# Altium PCB PCB1.PcbDoc
Units mm, origin at the board's own origin, x right, y up, seen from the top; angles counter-clockwise.
Board outline 95 x 60 mm, 2 copper layers (L1 (PWR), L4 (Sig)), stack 1.535 mm thick; 65 components, 34 nets, 229 pads, 84 vias.
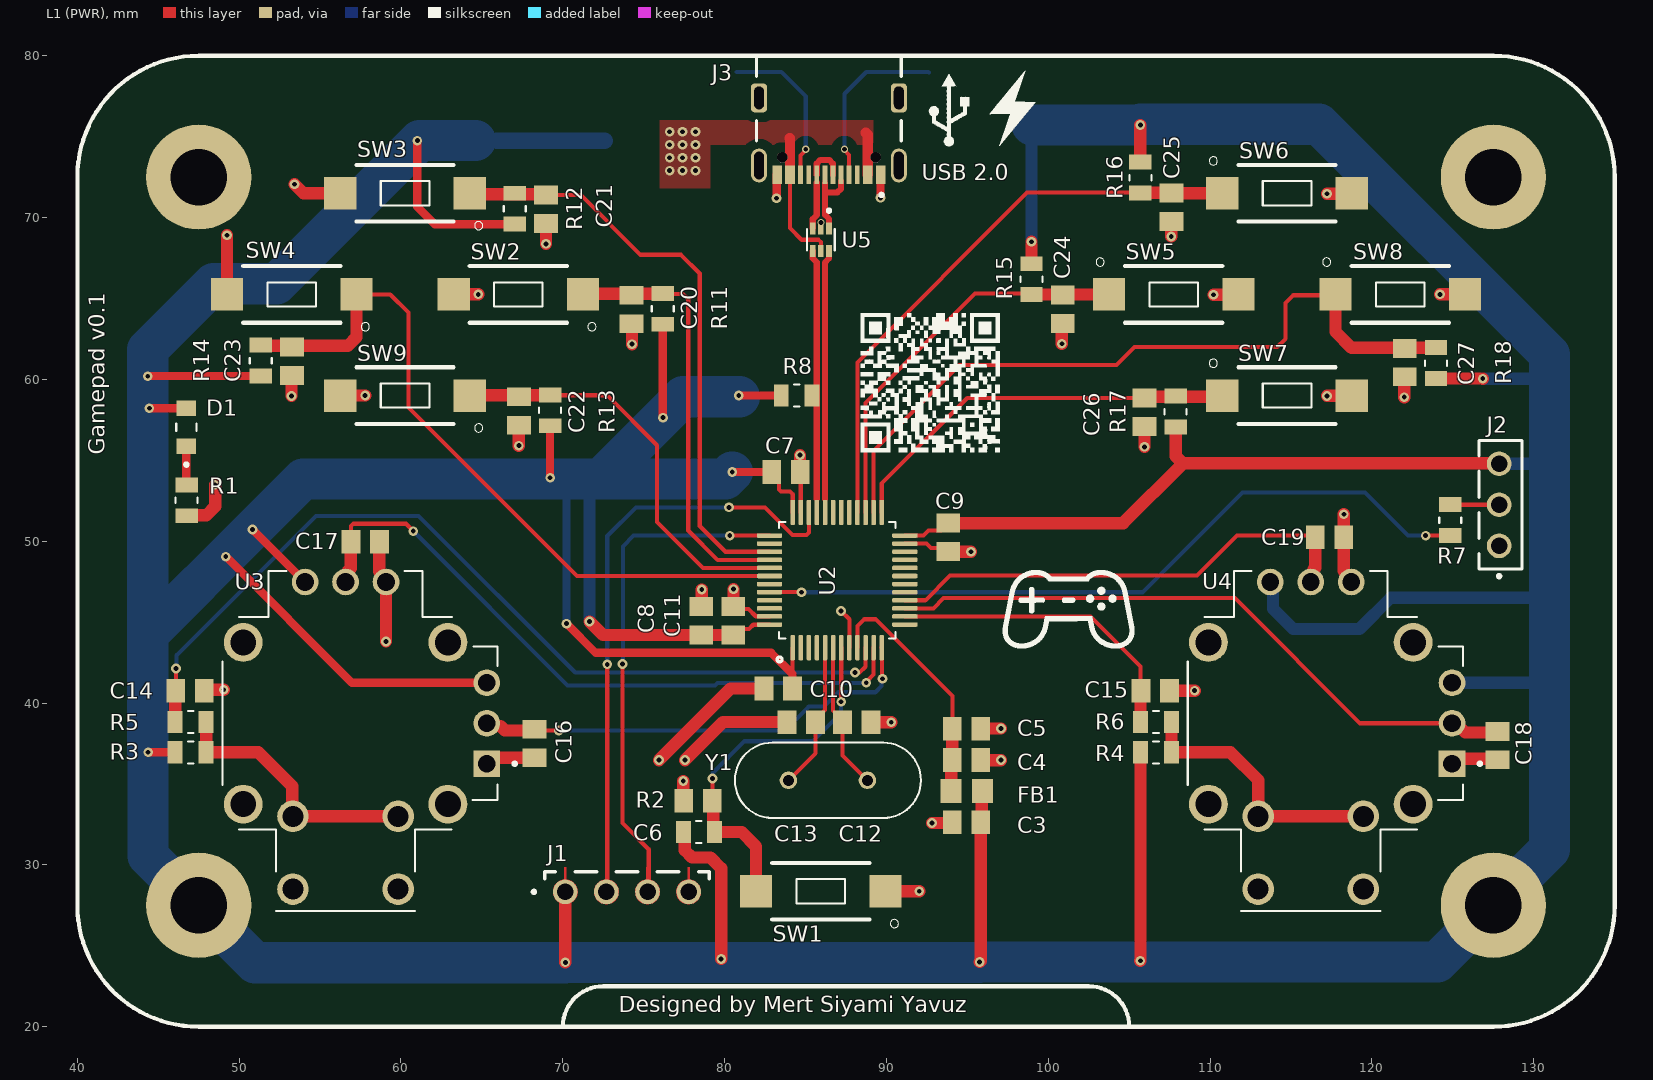
[diagram p0: L1 (PWR) view]
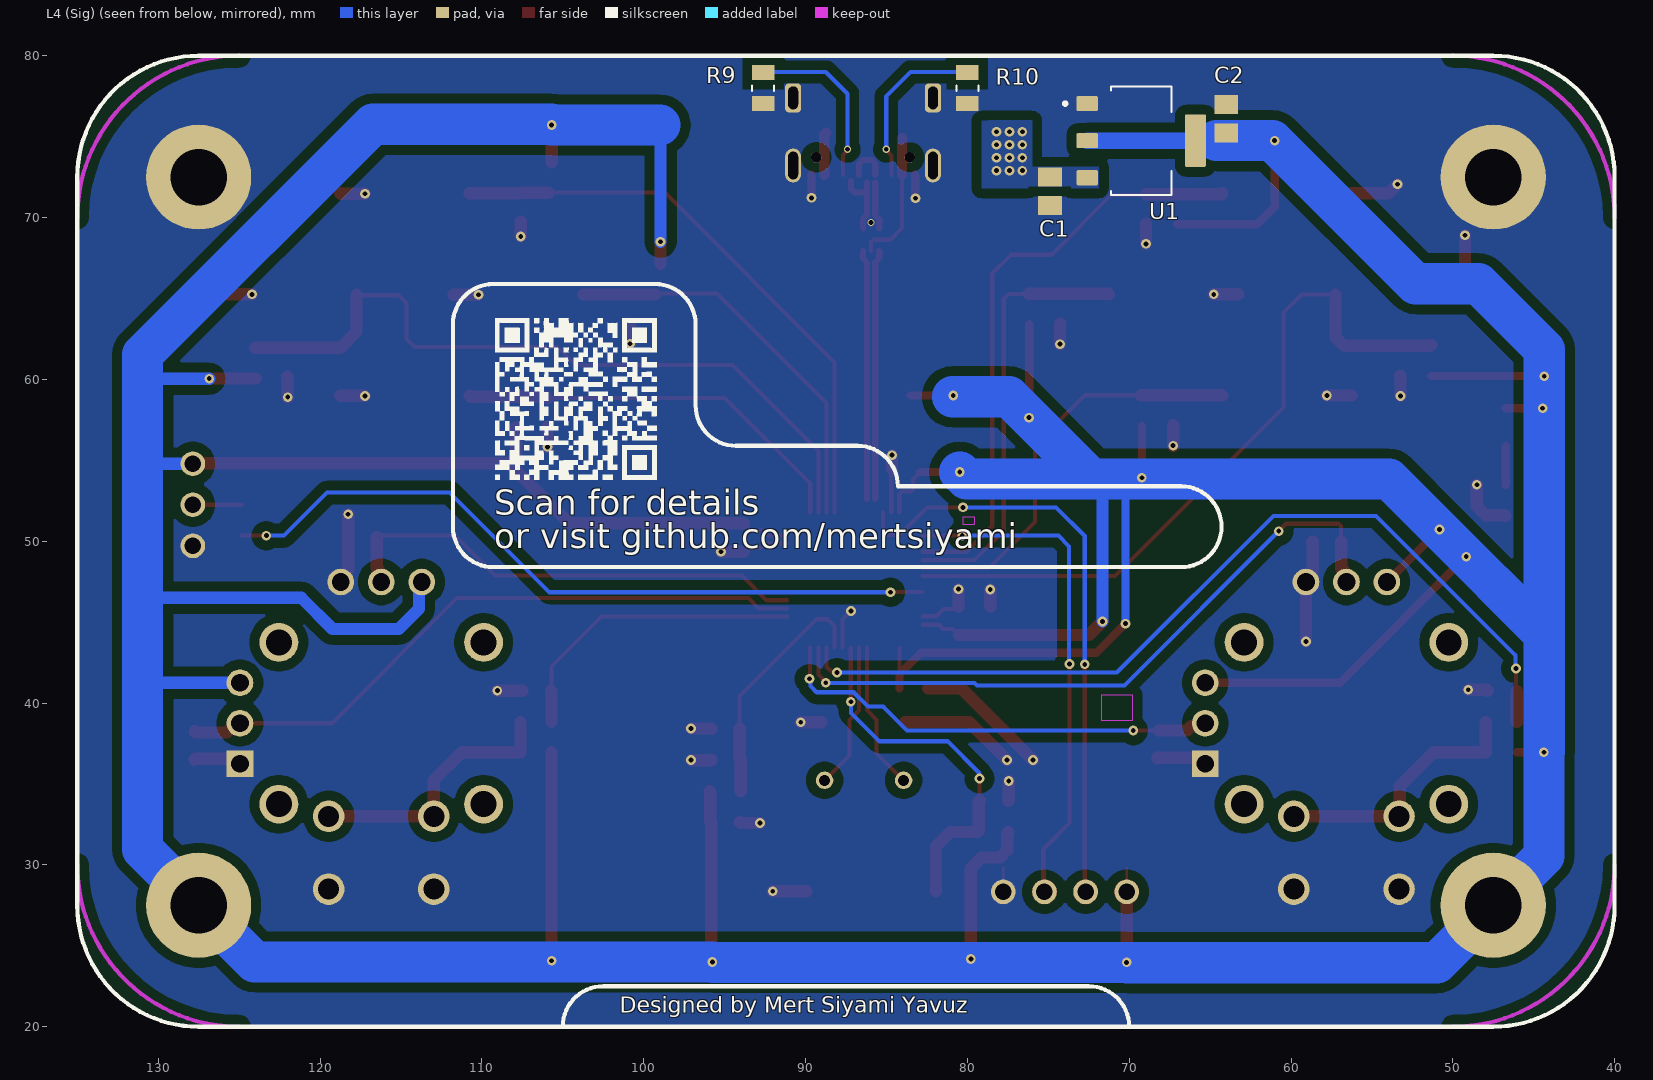
[diagram p1: L4 (Sig) view, seen from below]
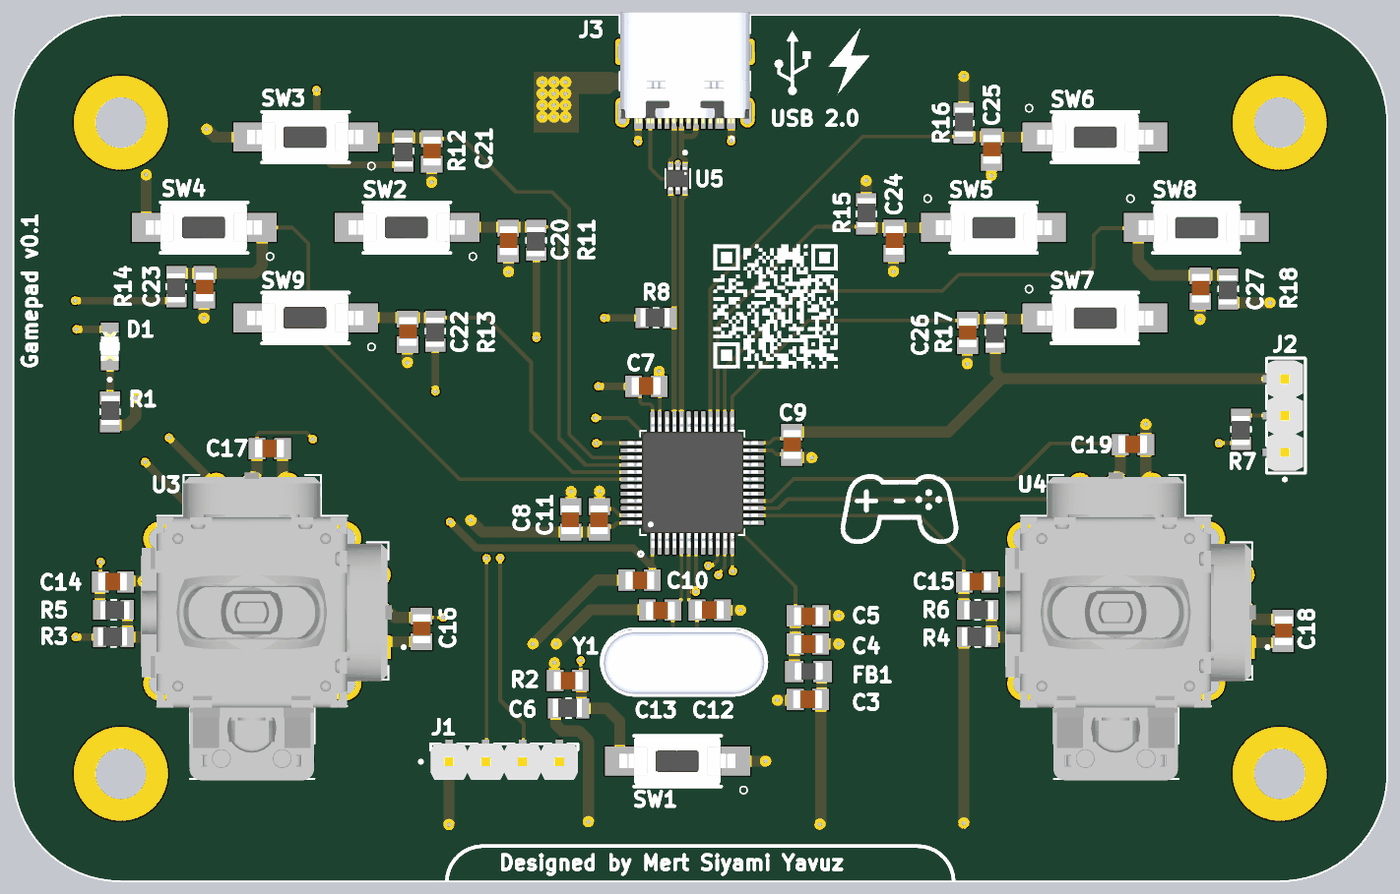
[diagram p2: 3D render of the assembled board from above, using the file's embedded part models]
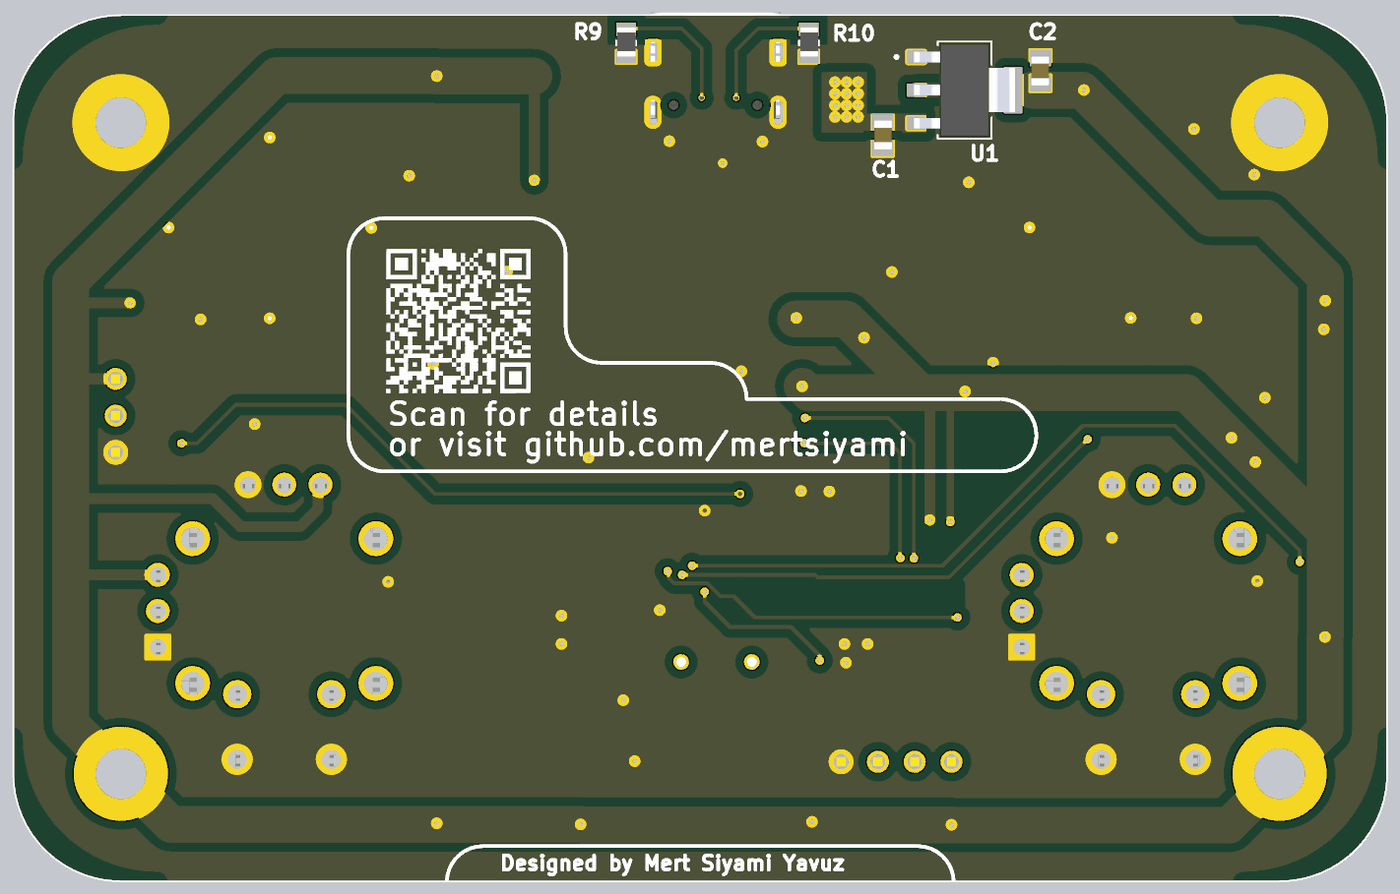
[diagram p3: 3D render of the assembled board from below, using the file's embedded part models]

## Layer stack, top to bottom
Top Solder: solder mask 0.01, Solder Resist, Dk 3.5
L1 (PWR): signal copper 0.035
Dielectric 1: core 1.465, Core-039, Dk 4.8
L4 (Sig): signal copper 0.035
Bottom Solder: solder mask 0.01, Solder Resist, Dk 3.5

## Board outline
40,27.5 ccw(c47.5,27.5) 47.5,20 127.5,20 ccw(c127.5,27.5) 135,27.5 135,72.5 ccw(c127.5,72.5) 127.5,80 47.5,80 ccw(c47.5,72.5) 40,72.5

## Design rules (kind name [scope] priority, off if disabled: settings)
Clearance [InPolygon] p1: gap=0.6 ignorepadtopadclearanceinfootprint=TRUE
Clearance Clearance_2 [All] p2 off: gap=0.1 ignorepadtopadclearanceinfootprint=TRUE
ComponentClearance [All] p1 off: gap=0.254 collisioncheckmode=3 verticalgap=0.254 showdistances=FALSE
DiffPairsRouting DiffPairsRouting_2 [InDifferentialPair('USBSTM')] p1: maxlimit=0.127 minlimit=0.127 mostfreqgap=0.127 toplayer_minwidth=0.38 toplayer_maxwidth=0.38 toplayer_prefwidth=0.38 bottomlayer_minwidth=0.38 bottomlayer_maxwidth=0.38 bottomlayer_prefwidth=0.38 impedanceprofiledriven=TRUE impedanceprofileid={373E327E-05DF-448B-B669-AD6836C57D6D} impedanceprofilevalue=90.000000 maxuncoupledlength=12.7
DiffPairsRouting DiffPairsRouting_1 [InDifferentialPair('USB')] p2: maxlimit=0.127 minlimit=0.127 mostfreqgap=0.127 toplayer_minwidth=0.38 toplayer_maxwidth=0.38 toplayer_prefwidth=0.38 bottomlayer_minwidth=0.38 bottomlayer_maxwidth=0.38 bottomlayer_prefwidth=0.38 impedanceprofiledriven=TRUE impedanceprofileid={373E327E-05DF-448B-B669-AD6836C57D6D} impedanceprofilevalue=90.000000 maxuncoupledlength=12.7
HoleSize [All] p1: absolutevalues=TRUE maxlimit=10 minlimit=0.025 maxpercent=80.000 minpercent=20.000
HoleToHoleClearance [All] p1: gap=0.1 allowstackedmicrovias=TRUE
MinimumSolderMaskSliver [All] p1: minsoldermaskwidth=0.015
PlaneClearance [All] p1 off: clearance=3
PlaneConnect [All] p1: planeconnectstyle=Direct reliefexpansion=0.508 reliefentries=4 reliefconductorwidth=0.254 reliefairgap=0.254
PolygonConnect [All] p1: connectstyle=Direct reliefconductorwidth=0.254 reliefentries=4 polygonreliefangle="90 Angle" airgapwidth=0.254
RoutingVias [All] p1: holewidth=0.254 width=0.254 viastyle="Through Hole" minholewidth=0.15 minwidth=0.25 maxholewidth=0.762 maxwidth=0.762
RoutingVias RoutingVias_1 [All] p2: holewidth=0.711 width=1.27 viastyle="Through Hole" minholewidth=0.711 minwidth=1.27 maxholewidth=0.711 maxwidth=1.27
ShortCircuit ShortCircuit_1 [All] p1: allowed=FALSE
ShortCircuit [All] p2: allowed=FALSE
SilkToSilkClearance [All] p1: silktosilkclearance=0.1
SilkToSolderMaskClearance [IsPad] p1: minsilkscreentomaskgap=0.1 clearancetoexposedcopper=TRUE
SolderMaskExpansion [All] p1: expansion=0.102 istentingtop=FALSE
Width [All] p1: maxlimit=2.54 minlimit=0.16 preferedwidth=0.254 minimp=50.000000 maximp=50.000000 favimp=50.000000
Width Width_1 [All] p2 off: maxlimit=0.254 minlimit=0.254 preferedwidth=0.254
20 further rules are at their usual default settings.

## Classes and differential pairs
differential pair USBSTM: +USBSTM_P -USBSTM_N
differential pair USB: +USB_P -USB_N

## Components (designator, comment, footprint, x,y, rotation, side; value= is the part's Value field where it differs from the comment)
C1 "22uF" CAPC2012X94N 74.9,71.625 r90 bottom
C2 "22uF" CAPC2012X94N 64.008,76.098 r270 bottom
C3 "1uF" CAPC2012X94N 94.94,32.632 r180 top
C4 "10nF" CAPC2012X94N 94.94,36.487 r0 top
C5 "1uF" CAPC2012X94N 94.94,38.414 r0 top
C6 "100nF" CAPC2012X94N 78.359,33.96 r0 top
C7 "100nF" CAPC2012X94N 83.786,54.28 r180 top
C8 "100nF" CAPC2012X94N 78.557,45.082 r270 top
C9 "100nF" CAPC2012X94N 93.822,50.238 r90 top
C10 "100nF" CAPC2012X94N 83.312,40.894 r0 top
C11 "10uF" CAPC2012X94N 80.538,45.082 r270 top
C12 "22pF" CAPC2012X94N 88.158,38.808 r180 top
C13 "22pF" CAPC2012X94N 84.729,38.808 r0 top
C14 "100nF" CAPC2012X94N 46.956,40.761 r180 top
C15 "100nF" CAPC2012X94N 106.608,40.761 r180 top
C16 "100nF" CAPC2012X94N 68.25,37.5 r90 top
C17 "100nF" CAPC2012X94N 57.785,49.962 r180 top
C18 "100nF" CAPC2012X94N 127.75,37.37 r90 top
C19 "100nF" CAPC2012X94N 117.38,50.25 r180 top
C20 "100nF" CAPC2012X94N 74.25,64.322 r90 top
C21 "100nF" CAPC2012X94N 68.961,70.51 r90 top
C22 "100nF" CAPC2012X94N 67.297,58.045 r90 top
C23 "100nF" CAPC2012X94N 53.258,61.12 r90 top
C24 "100nF" CAPC2012X94N 100.889,64.338 r90 top
C25 "100nF" CAPC2012X94N 107.608,70.634 r90 top
C26 "100nF" CAPC2012X94N 105.943,57.963 r90 top
C27 "100nF" CAPC2012X94N 122.022,61.036 r90 top
D1 "LED" "LED_V0805-SMD-R (RED)" 46.737,57.038 r90 top
FB1 "120R" FB_MI0805K400R-10 94.965,34.559 r0 top
J1 "MALE HEADER 1X4" SAMTEC_MTLW-104-X-X-S-X 73.965,28.331 r180 top
J2 "MALE HEADER 1X3" SAMTEC_MTLW-103-XX-XX-S-XXX 127.855,52.252 r270 top
J3 "USB4105GFA060" GCT_USB4105GFA060 86.444,77.396 r180 top
R1 "1k5" RESC2012X60N 46.751,52.527 r90 top
R2 "10k" RESC2012X60N 78.408,32.027 r180 top
R3 "5k1" RESC2012X60N 47.001,36.951 r180 top
R4 "5k1" RESC2012X60N 106.653,36.951 r180 top
R5 "5k1" RESC2012X60N 47.001,38.831 r0 top
R6 "5k1" RESC2012X60N 106.653,38.831 r0 top
R7 "10k" RESC2012X60N 124.838,51.305 r270 top
R8 "RES" RESC2012X60N 84.454,59.006 r180 top
R9 "5k1" RESC2012X60N 92.618,78 r90 bottom
R10 "5k1" RESC2012X60N 80,78 r90 bottom
R11 "5k1" RESC2012X60N 76.175,64.364 r270 top
R12 "5k1" RESC2012X60N 67.031,70.548 r270 top
R13 "5k1" RESC2012X60N 69.215,58.09 r270 top
R14 "5k1" RESC2012X60N 51.333,61.165 r270 top
R15 "5k1" RESC2012X60N 98.958,66.192 r90 top
R16 "5k1" RESC2012X60N 105.689,72.466 r90 top
R17 "5k1" RESC2012X60N 107.869,58.011 r270 top
R18 "5k1" RESC2012X60N 123.952,61.011 r270 top
SW1 "RS-032G05A3-SMRT" SW_RS-032G05A3-SMRT 85.94,28.372 r180 top
SW2 "RS-032G05A3-SMRT" SW_RS-032G05A3-SMRT 67.25,65.25 r180 top
SW3 "RS-032G05A3-SMRT" SW_RS-032G05A3-SMRT 60.25,71.5 r180 top
SW4 "RS-032G05A3-SMRT" SW_RS-032G05A3-SMRT 53.25,65.25 r180 top
SW5 "RS-032G05A3-SMRT" SW_RS-032G05A3-SMRT 107.75,65.25 r0 top
SW6 "RS-032G05A3-SMRT" SW_RS-032G05A3-SMRT 114.75,71.5 r0 top
SW7 "RS-032G05A3-SMRT" SW_RS-032G05A3-SMRT 114.75,59 r0 top
SW8 "RS-032G05A3-SMRT" SW_RS-032G05A3-SMRT 121.75,65.25 r0 top
SW9 "RS-032G05A3-SMRT" SW_RS-032G05A3-SMRT 60.25,59 r180 top
U1 "AMS1117" SOT229P700X180-4N 69.25,74.75 r180 bottom
U2 "STM32F103C8T6TR" QFP50P900X900X160-48N 86.955,47.601 r90 top
U3 "THB001P" CNK_THB001P 56.575,38.75 r0 top
U4 "THB001P" CNK_THB001P 116.218,38.75 r0 top
U5 "USBLC6-2P6" SOT50P160X60-6N 85.948,68.628 r270 top
Y1 "8MHz" XTAL_HC49P488W43L1150T466H350 86.38,35.227 r0 top

## Footprints (in the part's own frame and the unit in brackets; to place one, negate y for a bottom-side part, rotate by r counter-clockwise, add the part's x,y. Pads: shape width x height; smd on the part's side, far side on the other; paste and mask are expansions set on the pad)
CAPC2012X94N [mm]
  rect 1.16x1.47 smd: 1(-0.88,0) 2(0.88,0)
  body extent -0.98,-0.65 1.03,0.6, height 0.94
CNK_THB001P [mm]
  round 1.95 hole 1.3: A(-3.25,-5.75) B(3.25,-5.75) C(-3.25,-10.25) D(3.25,-10.25)
  round 2.4 hole 1.6: S1(6.325,5) S2(-6.325,5) S3(-6.325,-5) S4(6.325,-5)
  rect 1.65x1.65 / inner round 1.65 / far side rect 1.65x1.65 hole 1.1: VR1_1(8.73,-2.5)
  round 1.65 hole 1.1: VR1_2(8.73,0) VR1_3(8.73,2.5) VR2_1(2.5,8.73) VR2_2(0,8.73) VR2_3(-2.5,8.73)
  silkscreen extent -7.6,-11.6 10.55,9.4, body extent -7.64,-11.7 9.64,9.58, height 19.35
FB_MI0805K400R-10 [mm]
  rect 1.285x1.47 smd: 1(-0.973,0) 2(0.973,0)
  body extent -0.97,-0.6 1.03,0.65, height 1.1
GCT_USB4105GFA060 [mm]
  rect 0.6x1.15 smd: A1_B12(-3.2,4.755) A4_B9(-2.4,4.755) B1_A12(3.2,4.755) B4_A9(2.4,4.755)
  rect 0.3x1.15 smd: A5(-1.25,4.755) A6(-0.25,4.755) A7(0.25,4.755) A8(1.25,4.755) B5(1.75,4.755) B6(0.75,4.755) B7(-0.75,4.755) B8(-1.75,4.755)
  oval 1x2.1 hole 0.6 slot 1.7 at 90 deg: SH1(-4.32,4.18) SH2(4.32,4.18)
  rrect50% 1x1.8 hole 0.6 slot 1.4 at 90 deg: SH3(-4.32,0) SH4(4.32,0)
  round 0.65 hole 0.65 unplated: ""(-2.89,3.68) ""(2.89,3.68)
  silkscreen extent -4.47,-2.6 4.47,6.1, body extent -4.47,-2.75 4.47,4.96, height 3.31
"LED_V0805-SMD-R (RED)" [mm]
  rect 0.95x1.2 smd: 1(-1.175,0) 2(1.175,0)
  silkscreen extent -2.4,-0.63 0.23,0.63, body extent -1,-0.63 1,0.63, height 0.8
QFP50P900X900X160-48N [mm]
  rrect50% 1.56x0.28 smd: 1(-4.18,2.75) 2(-4.18,2.25) 3(-4.18,1.75) 4(-4.18,1.25) 5(-4.18,0.75) 6(-4.18,0.25) 7(-4.18,-0.25) 8(-4.18,-0.75) 9(-4.18,-1.25) 10(-4.18,-1.75) 11(-4.18,-2.25) 12(-4.18,-2.75) 25(4.18,-2.75) 26(4.18,-2.25) 27(4.18,-1.75) 28(4.18,-1.25) 29(4.18,-0.75) 30(4.18,-0.25) 31(4.18,0.25) 32(4.18,0.75) 33(4.18,1.25) 34(4.18,1.75) 35(4.18,2.25) 36(4.18,2.75)
  rrect50% 0.28x1.56 smd: 13(-2.75,-4.18) 14(-2.25,-4.18) 15(-1.75,-4.18) 16(-1.25,-4.18) 17(-0.75,-4.18) 18(-0.25,-4.18) 19(0.25,-4.18) 20(0.75,-4.18) 21(1.25,-4.18) 22(1.75,-4.18) 23(2.25,-4.18) 24(2.75,-4.18) 37(2.75,4.18) 38(2.25,4.18) 39(1.75,4.18) 40(1.25,4.18) 41(0.75,4.18) 42(0.25,4.18) 43(-0.25,4.18) 44(-0.75,4.18) 45(-1.25,4.18) 46(-1.75,4.18) 47(-2.25,4.18) 48(-2.75,4.18)
  silkscreen extent -5.06,-3.6 3.6,3.71, body extent -4.47,-4.53 4.53,4.47, height 1.6
RESC2012X60N [mm]
  rect 0.92x1.38 smd: 1(-0.955,0) 2(0.955,0)
  silkscreen extent -0.17,-0.68 0.17,0.68, body extent -0.92,-0.65 1.08,0.6, height 0.6
SAMTEC_MTLW-103-XX-XX-S-XXX [mm]
  round 1.52 hole 1.02: 01(2.54,0) 02(0,0) 03(-2.54,0)
  silkscreen extent -3.97,-1.24 4.51,1.42, body extent -3.81,-1.24 3.81,1.24, height 5.84
SAMTEC_MTLW-104-X-X-S-X [mm]
  round 1.52 hole 1.02: 01(3.81,0) 02(1.27,0) 03(-1.27,0) 04(-3.81,0)
  L1 (PWR) region: 3.889,0.756 3.968,0.743 4.045,0.723 4.119,0.694 4.19,0.658 4.257,0.615 4.319,0.565 4.375,0.509 4.425,0.447 4.468,0.38 4.504,0.309 4.533,0.235 4.553,0.158 4.566,0.079 4.57,0 4.569,-0.038 4.566,-0.076 4.562,-0.113 4.555,-0.151 4.547,-0.187 4.537,-0.224 4.525,-0.259 4.511,-0.294 4.496,-0.329 4.479,-0.363 4.46,-0.395 4.44,-0.427 4.418,-0.458 4.395,-0.487 4.37,-0.516 4.344,-0.543 4.316,-0.569 4.287,-0.593 4.258,-0.616 4.227,-0.638 4.195,-0.658 4.162,-0.676 4.128,-0.692 4.093,-0.707 4.058,-0.721 4.022,-0.732 3.986,-0.742 3.949,-0.75 3.912,-0.756 3.875,-0.76 3.875,-1.53 3.745,-1.53 3.745,-0.76 3.708,-0.756 3.671,-0.75 3.634,-0.742 3.598,-0.732 3.562,-0.721 3.527,-0.707 3.492,-0.692 3.458,-0.676 3.425,-0.658 3.393,-0.638 3.362,-0.616 3.333,-0.593 3.304,-0.569 3.276,-0.543 3.25,-0.516 3.225,-0.487 3.202,-0.458 3.18,-0.427 3.16,-0.395 3.141,-0.363 3.124,-0.329 3.109,-0.294 3.095,-0.259 3.083,-0.224 3.073,-0.187 3.065,-0.151 3.058,-0.113 3.054,-0.076 3.051,-0.038 3.05,0 3.054,0.079 3.067,0.158 3.087,0.235 3.116,0.309 3.152,0.38 3.195,0.447 3.245,0.509 3.301,0.565 3.363,0.615 3.43,0.658 3.501,0.694 3.575,0.723 3.652,0.743 3.731,0.756 3.81,0.76
  L1 (PWR) region: 1.349,0.756 1.428,0.743 1.505,0.723 1.579,0.694 1.65,0.658 1.717,0.615 1.779,0.565 1.835,0.509 1.885,0.447 1.928,0.38 1.964,0.309 1.993,0.235 2.013,0.158 2.026,0.079 2.03,0 2.029,-0.038 2.026,-0.076 2.022,-0.113 2.015,-0.151 2.007,-0.187 1.997,-0.224 1.985,-0.259 1.971,-0.294 1.956,-0.329 1.939,-0.363 1.92,-0.395 1.9,-0.427 1.878,-0.458 1.855,-0.487 1.83,-0.516 1.804,-0.543 1.776,-0.569 1.747,-0.593 1.718,-0.616 1.687,-0.638 1.655,-0.658 1.622,-0.676 1.588,-0.692 1.553,-0.707 1.518,-0.721 1.482,-0.732 1.446,-0.742 1.409,-0.75 1.372,-0.756 1.335,-0.76 1.335,-1.53 1.205,-1.53 1.205,-0.76 1.168,-0.756 1.131,-0.75 1.094,-0.742 1.058,-0.732 1.022,-0.721 0.987,-0.707 0.952,-0.692 0.918,-0.676 0.885,-0.658 0.853,-0.638 0.822,-0.616 0.793,-0.593 0.764,-0.569 0.736,-0.543 0.71,-0.516 0.685,-0.487 0.662,-0.458 0.64,-0.427 0.62,-0.395 0.601,-0.363 0.584,-0.329 0.569,-0.294 0.555,-0.259 0.543,-0.224 0.533,-0.187 0.525,-0.151 0.518,-0.113 0.514,-0.076 0.511,-0.038 0.51,0 0.514,0.079 0.527,0.158 0.547,0.235 0.576,0.309 0.612,0.38 0.655,0.447 0.705,0.509 0.761,0.565 0.823,0.615 0.89,0.658 0.961,0.694 1.035,0.723 1.112,0.743 1.191,0.756 1.27,0.76
  L1 (PWR) region: -1.191,0.756 -1.112,0.743 -1.035,0.723 -0.961,0.694 -0.89,0.658 -0.823,0.615 -0.761,0.565 -0.705,0.509 -0.655,0.447 -0.612,0.38 -0.576,0.309 -0.547,0.235 -0.527,0.158 -0.514,0.079 -0.51,0 -0.511,-0.038 -0.514,-0.076 -0.518,-0.113 -0.525,-0.151 -0.533,-0.187 -0.543,-0.224 -0.555,-0.259 -0.569,-0.294 -0.584,-0.329 -0.601,-0.363 -0.62,-0.395 -0.64,-0.427 -0.662,-0.458 -0.685,-0.487 -0.71,-0.516 -0.736,-0.543 -0.764,-0.569 -0.793,-0.593 -0.822,-0.616 -0.853,-0.638 -0.885,-0.658 -0.918,-0.676 -0.952,-0.692 -0.987,-0.707 -1.022,-0.721 -1.058,-0.732 -1.094,-0.742 -1.131,-0.75 -1.168,-0.756 -1.205,-0.76 -1.205,-1.53 -1.335,-1.53 -1.335,-0.76 -1.372,-0.756 -1.409,-0.75 -1.446,-0.742 -1.482,-0.732 -1.518,-0.721 -1.553,-0.707 -1.588,-0.692 -1.622,-0.676 -1.655,-0.658 -1.687,-0.638 -1.718,-0.616 -1.747,-0.593 -1.776,-0.569 -1.804,-0.543 -1.83,-0.516 -1.855,-0.487 -1.878,-0.458 -1.9,-0.427 -1.92,-0.395 -1.939,-0.363 -1.956,-0.329 -1.971,-0.294 -1.985,-0.259 -1.997,-0.224 -2.007,-0.187 -2.015,-0.151 -2.022,-0.113 -2.026,-0.076 -2.029,-0.038 -2.03,0 -2.026,0.079 -2.013,0.158 -1.993,0.235 -1.964,0.309 -1.928,0.38 -1.885,0.447 -1.835,0.509 -1.779,0.565 -1.717,0.615 -1.65,0.658 -1.579,0.694 -1.505,0.723 -1.428,0.743 -1.349,0.756 -1.27,0.76
  L1 (PWR) region: -3.731,0.756 -3.652,0.743 -3.575,0.723 -3.501,0.694 -3.43,0.658 -3.363,0.615 -3.301,0.565 -3.245,0.509 -3.195,0.447 -3.152,0.38 -3.116,0.309 -3.087,0.235 -3.067,0.158 -3.054,0.079 -3.05,0 -3.051,-0.038 -3.054,-0.076 -3.058,-0.113 -3.065,-0.151 -3.073,-0.187 -3.083,-0.224 -3.095,-0.259 -3.109,-0.294 -3.124,-0.329 -3.141,-0.363 -3.16,-0.395 -3.18,-0.427 -3.202,-0.458 -3.225,-0.487 -3.25,-0.516 -3.276,-0.543 -3.304,-0.569 -3.333,-0.593 -3.362,-0.616 -3.393,-0.638 -3.425,-0.658 -3.458,-0.676 -3.492,-0.692 -3.527,-0.707 -3.562,-0.721 -3.598,-0.732 -3.634,-0.742 -3.671,-0.75 -3.708,-0.756 -3.745,-0.76 -3.745,-1.53 -3.875,-1.53 -3.875,-0.76 -3.912,-0.756 -3.949,-0.75 -3.986,-0.742 -4.022,-0.732 -4.058,-0.721 -4.093,-0.707 -4.128,-0.692 -4.162,-0.676 -4.195,-0.658 -4.227,-0.638 -4.258,-0.616 -4.287,-0.593 -4.316,-0.569 -4.344,-0.543 -4.37,-0.516 -4.395,-0.487 -4.418,-0.458 -4.44,-0.427 -4.46,-0.395 -4.479,-0.363 -4.496,-0.329 -4.511,-0.294 -4.525,-0.259 -4.537,-0.224 -4.547,-0.187 -4.555,-0.151 -4.562,-0.113 -4.566,-0.076 -4.569,-0.038 -4.57,0 -4.566,0.079 -4.553,0.158 -4.533,0.235 -4.504,0.309 -4.468,0.38 -4.425,0.447 -4.375,0.509 -4.319,0.565 -4.257,0.615 -4.19,0.658 -4.119,0.694 -4.045,0.723 -3.968,0.743 -3.889,0.756 -3.81,0.76
  silkscreen extent -5.08,-1.24 5.85,0.1, body extent -5.08,-1.24 5.08,1.24, height 9.91
SOT50P160X60-6N [mm]
  rrect8% 0.75x0.35 smd: 1(-0.69,0.5) 2(-0.69,0) 3(-0.69,-0.5) 4(0.69,-0.5) 5(0.69,0) 6(0.69,0.5)
  silkscreen extent -1.9,-0.85 0.65,0.85, body extent -0.81,-0.81 0.79,0.79, height 0.6
SOT229P700X180-4N [mm]
  rrect15% 1.31x0.93 smd: 1(-3.345,2.29) 2(-3.345,0) 3(-3.345,-2.29)
  rrect15% 1.31x3.24 smd: 4(3.345,0)
  silkscreen extent -4.8,-3.36 1.86,3.36, body extent -3.5,-3.25 3.5,3.25, height 1.8
SW_RS-032G05A3-SMRT [mm]
  rect 2x2 smd: 1(-4,0) 2(4,0)
  silkscreen extent -4.8,-1.75 3,2.25, body extent -3.97,-1.76 4.03,1.74, height 4.3
XTAL_HC49P488W43L1150T466H350 [mm]
  round 1.08 hole 0.68: 1(-2.44,0) 2(2.44,0)
  silkscreen extent -5.75,-2.33 5.75,2.33, body extent -5.75,-2.41 5.75,2.25, height 3.5

## Part data
C1 C2 C3 C4 C5 C6 C7 C8 C9 C10 C11 C12 C13 C14 C15 C16 C17 C18 C19 C20 C21 C22 C23 C24 C25 C26 C27: library part CAP, "10000pF Â±5% 16V Ceramic Capacitor X7R 0805 _2012 Metric_", Package="2012 AVX", Availability=Unavailable, MF=AVX, MP=0805YC103J4T2A, Price=None, SnapEDA_Link=https://www.snapeda.com/parts/0805YC103J4T2A/AVX/view-part/606803/?ref=snap
D1: "V0805 - Valcon 0805 Type Surface Mount LED", Package=None, Availability="No availability data", Check_prices=https://www.snapeda.com/parts/V0805-SMD-R%20(Red)/Valcon/view-part/4780809/?ref=eda, MF=Valcon, MP="V0805-SMD-R (Red)", Price=None, Purchase-URL="https://pricing.snapeda.com/search/part/V0805-SMD-R (Red)/?ref=eda", SnapEDA_Link=https://www.snapeda.com/parts/V0805-SMD-R%20(Red)/Valcon/view-part/4780809/?ref=snap
FB1: library part FB, "40 Ohms @ 100MHz 1 Power Line Ferrite Bead 0805 (2012 Metric) 1.5A 50mOhm", Package="0805 Laird-Signal Integrity Products", Availability=Warning, Check_prices=https://www.snapeda.com/parts/MI0805K400R-10/Laird/view-part/4794545/?ref=eda, MF="Laird-Signal Integrity Products", MP=MI0805K400R-10, Price=None, Purchase-URL=https://pricing.snapeda.com/search/part/MI0805K400R-10/?ref=eda, SnapEDA_Link=https://www.snapeda.com/parts/MI0805K400R-10/Laird/view-part/4794545/?ref=snap
J1 J3: Package=None, Availability=Unavailable, Price=None
  J1: MF="{'manufacturer': u'Samtec Inc.'}", MP=MTLW-104-X-X-S-X
  J3: MF="{'manufacturer': u'GCT'}", MP=USB4105GFA060
J2: "Connector Header Through Hole 40 position 0.100\" (2.54mm)", Package=None, Availability=Unavailable, MP=MTLW-103-XX-XX-S-XXX, Price=None
R1 R2 R3 R4 R5 R6 R7 R9 R10 R11 R12 R13 R14 R15 R16 R17 R18: library part RES, "330 Ohms Â±1% 0.125W, 1/8W Chip Resistor 0805 _2012 Metric_ Moisture Resistant Thick Film", Package="2012 Rohm Semiconductor", Availability=Unavailable, MF=Yageo, MP=RC0805FR-07330RL, Price=None, SnapEDA_Link=https://www.snapeda.com/parts/RC0805FR-07330RL/Yageo/view-part/106115/?ref=snap
R8: "330 Ohms Â±1% 0.125W, 1/8W Chip Resistor 0805 _2012 Metric_ Moisture Resistant Thick Film", Package="2012 Rohm Semiconductor", Availability=Unavailable, MF=Yageo, MP=RC0805FR-07330RL, Price=None, SnapEDA_Link=https://www.snapeda.com/parts/RC0805FR-07330RL/Yageo/view-part/106115/?ref=snap
SW1 SW2 SW3 SW4 SW5 SW6 SW7 SW8 SW9: "Tactile Switch SPST-NO Top Actuated Surface Mount", Package=None, Availability=Unavailable, MF=C&K, MP=RS032G05A3SMRT, Price=None, SnapEDA_Link=https://www.snapeda.com/parts/RS032G05A3SMRT/C%26K/view-part/578384/?ref=snap
U1: "1A LOW DROPOUT VOLTAGE REGULATOR SOT-223", Package="SOT-223 Seeed Technology", Availability="Not in stock", Check_prices=https://www.snapeda.com/parts/AMS1117/Advanced+Monolithic+Systems/view-part/?ref=eda, MF="Advanced Monolithic Systems", MP=AMS1117, Price=None, SnapEDA_Link=https://www.snapeda.com/parts/AMS1117/Advanced+Monolithic+Systems/view-part/?ref=snap
U2: "Mainstream Performance line, ARM Cortex-M3 MCU with 64 Kbytes Flash, 72 MHz CPU, motor control, USB and CAN", Package=None, Availability=Unavailable, MF="{'manufacturer': u'STMicroelectronics'}", MP=STM32F103C8T6TR, Price=None
U3 U4: "Joystick, 2 - Axis Analog (Resistive) Output", Package=None, Availability="In Stock", Check_prices=https://www.snapeda.com/parts/THB001P/C%2526K/view-part/?ref=eda, MF=C&K, MP=THB001P, Price=None, Purchase-URL=https://pricing.snapeda.com/search/part/THB001P/?ref=eda, SnapEDA_Link=https://www.snapeda.com/parts/THB001P/C%2526K/view-part/?ref=snap
U5: "17V Clamp 5A _8/20Âµs_ Ipp Tvs Diode Surface Mount SOT-666", Package="SOT-563 STMicroelectronics", Availability=Unavailable, MF=STMicroelectronics, MP=USBLC6-2P6, Price=None, SnapEDA_Link=https://www.snapeda.com/parts/USBLC6-2P6/STMicroelectronics/view-part/106846/?ref=snap
Y1: library part HC-49/U-S16000000ABJB, "16 MHz Â±30ppm Crystal 18pF 50 Ohms HC-49/US", Package="HC-49/US Citizen Finetech Miyota", Availability="In Stock", Check_prices=https://www.snapeda.com/parts/HC-49/U-S16000000ABJB/Citizen+Finedevice+Co+Ltd/view-part/?ref=eda, MF="Citizen Finedevice Co Ltd", MP=HC-49/U-S16000000ABJB, Price=None, Purchase-URL=https://pricing.snapeda.com/search/part/HC-49/U-S16000000ABJB/?ref=eda, SnapEDA_Link=https://www.snapeda.com/parts/HC-49/U-S16000000ABJB/Citizen+Finedevice+Co+Ltd/view-part/?ref=snap

## Free pads (board coordinates)
  round 6.5 hole 3.5: 15(47.5,27.5) 15(47.5,72.5) 15(127.5,27.5) 15(127.5,72.5)

## Via types
v1: diameter 0.6, hole 0.3, L1 (PWR) to L4 (Sig), 81 vias
v2: diameter 0.45, hole 0.3, L1 (PWR) to L4 (Sig), 3 vias

## Nets (pads, with @x,y where several pads share a name; then routed paths per layer and width w, separated by ;. In a path a pad name is that pad's centre, name@x,y a point inside that pad or via, vN(x,y) a via of type N, cw(c..) or ccw(c..) an arc to the next point about the centre after c; other vN are vias at no path point)
+3.3VA: C4.1 C5.1 FB1.1 U2.9 | length 15.2
  L1 (PWR) w0.254: U2.9 88.205,44.757 88.629,45.181 89.329,45.181 94.076,40.434 94.076,38.431 C5.1
  L1 (PWR) w0.762: FB1.1 C4.1@93.992,36.487 ; C4.1 C5.1
+3V3: C2.2 C3.1 C7.2 C8.2 C9.2 C10.2 C11.2 D1.2 FB1.2 J1.01 J2.03 pad.15@47.5,27.5 pad.15@127.5,27.5 R2.2 R3.2 R4.2 R8.2 R11.2 R12.2 R13.2 R14.2 R15.2 R16.2 R17.2 R18.2 U1.2 U1.4 U2.1 U2.24 U2.36 U2.48 U3.VR1_3 U3.VR2_3 U4.VR1_3 U4.VR2_3 | length 511.5
  L1 (PWR) w0.254: C11.2 80.912,44.576 81.505,44.576 81.766,44.838 82.762,44.838 U2.48 ; C7.2 83.359,53.827 83.359,53.192 83.49,53.061 84.049,53.061 84.205,52.904 U2.36 ; 84.192,41.792 U2.1@84.192,43.408 ; U2.24 92.286,50.351 92.608,50.673 93.377,50.673 C9.2
  L1 (PWR) w0.508: v1(44.348,60.198) 44.354,60.204 51.327,60.204 R14.2 ; v1(44.374,36.957) 44.377,36.954 46.043,36.954 R3.2 ; v1(44.45,58.218) 44.454,58.213 D1.2 ; v1(49.174,49.047) 56.972,41.25 U3.VR1_3 ; v1(50.825,50.724) 50.831,50.724 U3.VR2_3 ; v1(61.011,74.752) 61.011,70.663 62.081,69.593 R12.2 ; v1(69.215,53.924) R13.2 ; v1(70.231,44.907) 72.034,43.104 82.88,43.104 84.192,41.792 C10.2 ; v1@76.175,57.607 R11.2 ; v1(80.467,54.28) C7.2 ; v1(80.874,59.004) 80.875,59.006 R8.2
  L1 (PWR) w0.762: v1(70.155,23.978) J1.01 ; v1(71.653,45.034) 72.485,44.202 C8.2 C11.2 ; R2.2 77.532,31.948 77.532,30.901 77.978,30.455 79.121,30.455 79.781,29.794 v1(79.781,24.181) ; C9.2 104.621,51.118 108.315,54.813 ; v1(95.758,24.003) 95.82,24.065 C3.1 95.879,32.691 95.879,34.5 FB1.2 ; R15.2 v1(98.958,68.504) ; v1(105.689,24.079) 105.698,24.088 R4.2 ; R16.2 v1(105.689,75.717) ; R17.2 107.869,55.26 108.315,54.813 ; R18.2 126.837,60.056 v1(126.848,60.046) ; J2.03 127.834,54.813 108.315,54.813
  L4 (Sig) w0.508: v1(69.215,53.924) 69.291,53.848 70.231,52.908 v1@70.231,44.932
  L4 (Sig) w0.762: v1(71.653,45.034) 71.653,53.848 ; v1(98.958,68.504) 98.958,75.692 98.984,75.717 ; U4.VR2_3 113.888,47.31 113.888,45.827 115.138,44.577 119.228,44.577 121.158,46.507 130.962,46.507 ; U4.VR1_3 130.759,41.25 130.962,41.046 ; v1(126.848,60.046) 130.912,60.046 130.962,60.096 ; J2.03 130.958,54.792 130.962,54.788
  L4 (Sig) w1.016: U1.4 U1.2
  L4 (Sig) w2.54: C2.2@64.592,74.752 61.138,74.752 52.299,65.913 48.413,65.913 44.348,61.848 v1(44.348,60.198) 44.348,44.247 ; v1(80.467,54.28) 80.035,53.848 72.339,53.848 ; v1@80.924,58.928 77.419,58.928 72.339,53.848 ; 98.984,75.717 v1(105.689,75.717) ; v1@105.689,75.768 116.732,75.768 130.962,61.538 130.962,60.096 130.962,54.788 130.962,46.507 130.962,41.046 130.962,30.968 127.589,27.594 127.589,27.411 127.44,27.411 124.032,24.003 v1(95.758,24.003) 95.733,23.978 v1(70.155,23.978) 70.129,23.952 50.978,23.952 44.374,30.556 v1(44.374,36.957) 44.348,36.982 44.348,44.247 ; 44.348,44.247 v1(50.825,50.724) 53.95,53.848 69.291,53.848 71.653,53.848 72.339,53.848
  other v1: 76.192,57.638
+5V: C1.2 J3.A4_B9 J3.B4_A9 U1.3 U5.5 | length 11.1
  L1 (PWR) w0.254: J3.B4_A9 84.044,69.347 84.764,68.626 85.806,68.626 85.954,68.478 85.954,67.944 U5.5 U5.5@85.915,67.971
  L1 (PWR) w0.635: 84.023,74.905 84.044,74.884 J3.B4_A9 ; 88.722,75.235 88.844,75.113 J3.A4_B9
  other v1: 76.6,72.9 77.4,72.9 78.2,72.9 76.6,73.7 77.4,73.7 78.2,73.7 76.6,74.5 77.4,74.5 78.2,74.5 76.6,75.3 77.4,75.3 78.2,75.3
B1: C20.2 R11.1 SW2.1 U2.40 | length 26.7
  L1 (PWR) w0.254: R11.1@76.214,65.286 77.436,65.286 77.749,64.973 77.749,50.673 79.572,48.851 U2.40
  L1 (PWR) w0.762: SW2.1 71.286,65.286 R11.1@76.214,65.286
B2: C21.2 R12.1 SW3.1 U2.39 | length 36.8
  L1 (PWR) w0.254: C21.2 71.11,71.39 74.8,67.7 77.3,67.7 78.461,66.539 78.461,50.949 80.059,49.351 U2.39
  L1 (PWR) w0.762: SW3.1 64.309,71.441 C21.2@68.961,71.441
B3: C22.2 R13.1 SW9.1 U2.41 | length 25.7
  L1 (PWR) w0.254: R13.1@69.269,59.022 72.727,59.022 75.819,55.931 75.819,51.191 78.659,48.351 U2.41
  L1 (PWR) w0.762: SW9.1 64.272,59.022 R13.1@69.269,59.022
B4: C23.2 R14.1 SW4.1 U2.42 | length 48.4
  L1 (PWR) w0.254: C23.2 56.718,62 ; SW4.1 59.337,65.25 60.452,64.135 60.452,58.266 70.868,47.851 U2.42
  L1 (PWR) w0.762: R14.1 51.376,62.078 56.718,62.078 57.25,62.609 SW4.1
B5: C24.2 R15.1 SW5.1 U2.27 | length 24.3
  L1 (PWR) w0.254: U2.27 88.705,58.53 95.479,65.303 98.943,65.303 R15.1@98.958,65.319
  L1 (PWR) w0.762: R15.1@99.282,65.25 100.889,65.25 SW5.1
B6: C25.2 R16.1 SW6.1 U2.28 | length 36
  L1 (PWR) w0.254: U2.28 88.205,61.052 98.694,71.542 R16.1@105.689,71.542
  L1 (PWR) w0.762: R16.1@105.86,71.528 107.58,71.528 107.608,71.5 SW6.1
B7: C26.2 R17.1 SW7.1 U2.25 | length 25.1
  L1 (PWR) w0.254: U2.25 89.705,53.557 94.99,58.843 C26.2
  L1 (PWR) w0.762: C26.2 106.022,58.921 107.869,58.921 110.671,58.921 SW7.1
B8: C27.2 R18.1 SW8.1 U2.26 | length 46.6
  L1 (PWR) w0.254: U2.26 89.205,55.575 94.513,60.884 104.216,60.884 105.334,62.001 114.148,62.001 114.656,62.509 114.656,64.719 115.138,65.202 117.702,65.202 SW8.1
  L1 (PWR) w0.762: SW8.1 117.75,62.946 118.745,61.951 R18.1@124.003,61.951
BOOT0: R7.2 U2.44 | length 45.7
  L1 (PWR) w0.254: U2.44 84.747,46.851 v1(84.753,46.844) v1@84.76,46.838 ; v1(123.317,50.343) 123.324,50.35 R7.2
  L4 (Sig) w0.254: v1(84.753,46.844) 105.823,46.844 111.989,53.01 119.558,53.01 122.225,50.343 v1(123.317,50.343)
GND: C1.1 C2.1 C3.2 C4.2 C5.2 C6.1 C7.1 C8.1 C9.1 C10.1 C11.1 C12.1 C13.1 C14.1 C15.1 C16.1 C17.1 C18.1 C19.1 C20.1 C21.1 C22.1 C23.1 C24.1 C25.1 C26.1 C27.1 J1.04 J2.01 J3.A1_B12 J3.B1_A12 J3.SH1 J3.SH2 J3.SH3 J3.SH4 pad.15@47.5,72.5 pad.15@127.5,72.5 R1.1 R9.1 R10.1 SW1.1 SW2.2 SW3.2 SW4.2 SW5.2 SW6.2 SW7.2 SW8.2 SW9.2 U1.1 U2.8 U2.23 U2.35 U2.47 U3.C U3.D U3.VR1_1 U3.VR2_1 U4.C U4.D U4.VR1_1 U4.VR2_1 U5.2 | length 90.5
  L1 (PWR) w0.254: C11.1 80.694,45.806 81.478,45.806 81.92,45.364 82.762,45.364 U2.47 ; C7.1 84.705,54.241 U2.35 ; U5.2@85.954,69.524 v2(85.954,69.698) ; v1(87.193,45.692) 87.705,45.18 U2.8 ; U2.23 92.483,49.851 92.755,49.578 93.602,49.578 C9.1
  L1 (PWR) w0.508: v1(83.205,71.193) 83.224,71.213 83.224,72.622 J3.B1_A12 ; v1(89.631,71.219) 89.638,71.225 89.638,72.635 J3.A1_B12
  L1 (PWR) w0.762: R1.1 46.778,51.599 47.967,51.599 48.514,52.146 v1(48.514,53.492) ; C14.1 47.893,40.818 v1(49.047,40.818) ; SW4.2 49.25,67.393 ; 49.251,67.394 v1(49.251,68.91) ; v1(53.238,58.979) 53.238,60.221 C23.1 ; v1(53.416,72.06) 53.976,71.5 SW3.2 ; SW9.2 56.254,59.004 v1(57.785,59.004) ; C17.1@58.69,49.936 C17.1 58.665,48.13 59.075,47.72 v1(59.075,43.81) ; SW2.2 63.253,65.253 v1(64.77,65.253) ; U3.VR1_1 65.682,36.627 68.243,36.627 C16.1 C16.1@68.224,36.594 ; v1(67.285,55.905) 67.285,57.153 C22.1 ; v1(68.961,68.377) C21.1 ; C20.1 74.27,63.423 v1(74.27,62.179) ; v1(75.946,36.474) 80.366,40.894 C10.1 ; v1(77.445,35.179) 77.445,33.994 C6.1 ; v1(77.546,36.474) 79.902,38.83 83.65,38.83 83.672,38.808 C13.1 ; C8.1 78.588,45.993 v1(78.588,47.015) ; C11.1 80.543,45.968 v1(80.543,47.041) ; C7.1@84.658,54.451 v1(84.658,55.321) ; C12.1 89.041,38.811 v1(90.297,38.811) ; SW1.1 v1(92.024,28.372) ; v1(92.812,32.588) 94.016,32.588 C3.2 ; C9.1 93.831,49.349 v1(95.219,49.349) ; C4.2 95.832,36.474 v1(97.079,36.474) ; C5.2 95.836,38.43 v1(97.079,38.43) ; v1(100.838,62.205) 100.838,63.259 100.889,63.31 C24.1 ; v1(105.943,55.829) C26.1 ; C15.1 107.495,40.767 v1(109.042,40.767) ; v1(107.594,68.834) 107.594,69.74 C25.1 ; v1(110.211,65.227) 111.727,65.227 SW5.2 ; v1(117.221,58.979) 118.729,58.979 SW7.2 ; v1(117.221,71.476) 118.726,71.476 SW6.2 ; v1(118.262,51.664) 118.262,50.252 C19.1 118.26,48.178 118.718,47.72 U4.VR2_1 ; v1(121.996,58.903) 121.996,60.131 C27.1 ; v1(124.206,65.253) 125.747,65.253 SW8.2 ; U4.VR1_1 125.248,36.551 127.689,36.551 C18.1
NetD1_1: D1.1 R1.2 | length 2.4
  L1 (PWR) w0.508: D1.1 46.737,54.423 46.736,53.497 R1.2
NetJ2_02: J2.02 R7.1 | length 3
  L1 (PWR) w0.254: R7.1 124.846,52.252 J2.02
NetJ3_A5: J3.A5 R9.2 | length 10.9
  L1 (PWR) w0.254: v2(87.401,74.219) 87.401,74.166 87.694,73.873 J3.A5
  L4 (Sig) w0.254: v2(87.401,74.219) 87.401,77.651 88.75,79 92.573,79 R9.2
NetJ3_B5: J3.B5 R10.2 | length 9.9
  L1 (PWR) w0.254: J3.B5 84.694,73.846 85.014,74.166 v2(85.014,74.219)
  L4 (Sig) w0.254: 80.75,79 83.5,79 85.014,77.486 v2(85.014,74.219)
NetR3_1: R3.1 R5.2 U3.A U3.B | length 16.4
  L1 (PWR) w0.762: R5.2 R3.1 51.187,36.951 53.289,34.849 53.289,33.036 U3.A U3.B
NetR4_1: R4.1 R6.2 U4.A U4.B | length 16.7
  L1 (PWR) w0.762: R6.2 R4.1 111.258,36.951 112.979,35.23 112.979,33.011 U4.A U4.B
NRST: C6.2 R2.1 SW1.2 U2.7 | length 22.9
  L1 (PWR) w0.254: C6.2 79.239,35.322 v1(79.248,35.331) ; v1(87.198,40.081) 87.205,40.088 U2.7
  L1 (PWR) w0.762: C6.2 79.301,33.898 79.301,32.089 R2.1 81.054,32.027 81.94,31.14 SW1.2
  L4 (Sig) w0.254: v1(79.248,35.331) 79.248,35.662 81.229,37.643 85.446,37.643 87.198,39.395 v1(87.198,40.081)
OSCIN: C13.2 U2.5 Y1.1 | length 9.1
  L1 (PWR) w0.254: Y1.1 85.609,36.896 C13.2 85.609,38.963 86.205,39.559 U2.5
OSCOUT: C12.2 U2.6 Y1.2 | length 9.1
  L1 (PWR) w0.254: U2.6 86.705,39.536 87.278,38.963 C12.2 87.278,36.769 Y1.2
SW1_B: C14.2 R5.1 U2.10 | length 55.6
  L1 (PWR) w0.254: C14.2@46.046,40.731 C14.2 46.101,40.785 v1(46.101,42.139) ; v1(88.056,41.882) 88.329,41.882 88.692,42.244 88.692,43.408 U2.10
  L1 (PWR) w0.762: R5.1 C14.2@46.046,40.731
  L4 (Sig) w0.254: v1(46.101,42.139) 46.126,42.164 46.126,42.951 54.737,51.562 61.087,51.562 70.767,41.882 v1(88.056,41.882)
SW1_X: C16.2 U2.12 U3.VR1_2 | length 28.1
  L1 (PWR) w0.254: C16.2@68.173,38.303 v1(69.748,38.303) ; U2.12 89.718,43.408 89.718,41.532 v1(89.75,41.5)
  L1 (PWR) w0.762: U3.VR1_2 65.475,38.58 66.144,38.58 66.421,38.303 C16.2@68.173,38.303
  L4 (Sig) w0.254: v1(69.748,38.303) 83.727,38.303 85.2,39.776 86.131,39.776 87.02,40.665 89.306,40.665 89.684,41.043 89.684,41.434 v1(89.75,41.5)
SW1_Y: C17.2 U2.11 U3.VR2_2 | length 42.1
  L1 (PWR) w0.254: C17.2 56.905,50.931 57.054,51.079 60.3,51.079 v1(60.757,50.622) ; v1(88.75,41.25) 88.75,41.303 89.205,41.758 U2.11
  L1 (PWR) w0.762: U3.VR2_2 56.745,47.65 56.745,48.185 56.896,48.337 56.896,49.953 C17.2
  L4 (Sig) w0.254: v1(60.757,50.622) 70.298,41.081 79.393,41.081 79.562,41.25 v1(88.75,41.25)
SW2_B: C15.2 R6.1 U2.14 | length 19.3
  L1 (PWR) w0.254: U2.14 102.604,45.351 105.689,42.266 105.689,40.8 C15.2
  L1 (PWR) w0.762: R6.1 105.698,40.731 C15.2
SW2_X: C18.2 U2.15 U4.VR1_2 | length 40.3
  L1 (PWR) w0.254: U2.15 92.898,45.851 93.529,46.481 111.532,46.481 119.263,38.75 U4.VR1_2
  L1 (PWR) w0.762: U4.VR1_2 125.188,38.75 125.762,38.176 127.676,38.176 C18.2
SW2_Y: C19.2 U2.16 U4.VR2_2 | length 29.9
  L1 (PWR) w0.254: U2.16 92.398,46.351 93.929,47.881 109.197,47.881 111.658,50.343 116.407,50.343 C19.2
  L1 (PWR) w0.762: U4.VR2_2 116.388,47.65 116.388,48.258 116.5,48.37 C19.2
SWDCLK: J1.03 U2.37 | length 31.4
  L1 (PWR) w0.254: v1(73.685,42.418) 73.685,32.588 75.311,30.963 75.311,28.407 J1.03 ; v1@80.309,50.34 v1(80.315,50.345) 80.32,50.351 U2.37
  L4 (Sig) w0.254: v1(73.685,42.418) 73.711,42.443 73.711,49.682 74.374,50.345 v1(80.315,50.345)
SWDIO: J1.02 U2.34 | length 37.2
  L1 (PWR) w0.254: J1.02 72.746,28.382 v1(72.746,42.393) ; v1@80.264,52.095 v1(80.267,52.093) 82.486,52.093 84.195,50.384 85.056,50.384 85.205,50.533 U2.34
  L4 (Sig) w0.254: v1(72.746,42.393) 72.746,50.317 74.521,52.093 v1(80.267,52.093)
USB_N: J3.A7 J3.B7 U5.1 | length 4.5
  L1 (PWR) w0.38: J3.A7@86.202,72.161 86.202,71.552 ; U5.1 86.448,69.914 86.202,70.161 86.202,71.552 ; J3.B7@87.198,72.256 87.198,71.78 86.97,71.552 86.202,71.552
USB_P: J3.A6 J3.B6 U5.3 | length 5.5
  L1 (PWR) w0.38: U5.3 85.448,69.903 85.694,70.15 J3.B6@85.694,72.161 ; J3.B6 85.694,73.336 85.917,73.558 86.467,73.558 86.69,73.336 86.69,72.645 J3.A6
USBSTM_N: U2.32 U5.6 | length 15.4
  L1 (PWR) w0.38: 86.202,52.629 86.202,67.228 86.448,67.474 U5.6
USBSTM_P: R8.1 U2.33 U5.4 | length 15.4
  L1 (PWR) w0.38: U5.4 85.448,67.485 85.694,67.239 85.694,52.629
pads on no net: J3. J3.A8 J3.B8 U2.2 U2.3 U2.4 U2.13 U2.17 U2.18 U2.19 U2.20 U2.21 U2.22 U2.29 U2.30 U2.31 U2.38 U2.43 U2.45 U2.46 U3.S1 U3.S2 U3.S3 U3.S4 U4.S1 U4.S2 U4.S3 U4.S4

## Polygon pours and split planes (outlines as drawn)
+5V on L1 (PWR) "NONET_L01_P-001" (solid, pour order 205): 76,74.5 76,71.8 79.125,71.8 79.125,74.5
+5V on L1 (PWR) "NONET_L01_P-001" (solid, pour order 203): 76,76 76,74.5 89.175,74.5 89.175,76
GND on L4 (Sig) "NONET_L01_P-001" (solid, remove dead copper, pour order 206): 39.997,77.488 cw(c42.537,77.488) 42.537,80.028 132.457,80.028 cw(c132.457,77.488) 134.997,77.488 134.997,22.568 cw(c132.457,22.568) 132.457,20.028 42.537,20.028 cw(c42.537,22.568) 39.997,22.568 39.997,30.028
+5V on L4 (Sig) "NONET_L01_P-001" (solid, pour order 204): 71.875,73.125 71.875,71.8 79.125,71.8 79.125,76 76.025,76 76,76.025 76,73.125

## Keep-outs
L4 (Sig):
  rectangle: 79.578,51.003 80.239,51.511
  rectangle: 69.8,38.9 71.7,40.5
  lines w0.254: 40,30 ccw(c50,30) 50,20 ; 40,70 cw(c50,70) 50,80 ; 125,20 ccw(c125,30) 135,30 ; 125,80 cw(c125,70) 135,70

## Silkscreen, mask and mechanical layers (free items; w line width, h text height)
Top Overlay:
  drawing of 37 lines, arcs and shapes, not listed
  text "USB 2.0" at 92.177,72.314 h1
  text "Gamepad v0.1" at 41.704,55.347 h1 r90
  text "Designed by Mert Siyami Yavuz" at 73.457,20.882 h1
Bottom Overlay:
  drawing of 42 lines, arcs and shapes, not listed
  text "Scan for details" at 109.238,51.65 h1.52
  text "or visit github.com/mertsiyami" at 109.238,49.558 h1.52
  text "Designed by Mert Siyami Yavuz" at 101.473,20.856 h1
Mechanical 1:
  the board outline again, w0.254

## Text inside footprints (layer, text, board x,y; h text height)
J3: Mechanical 13 "PCB EDGE" at 81.044,79.896 h0.41 r180